# Altium PCB PCB2.PcbDoc
Units mil, origin at the board's own origin, x right, y up, seen from the top; angles counter-clockwise.
Board outline 3950 x 3450 mil, 2 copper layers (Top Layer, Bottom Layer); 74 components, 68 nets, 254 pads, 39 vias.
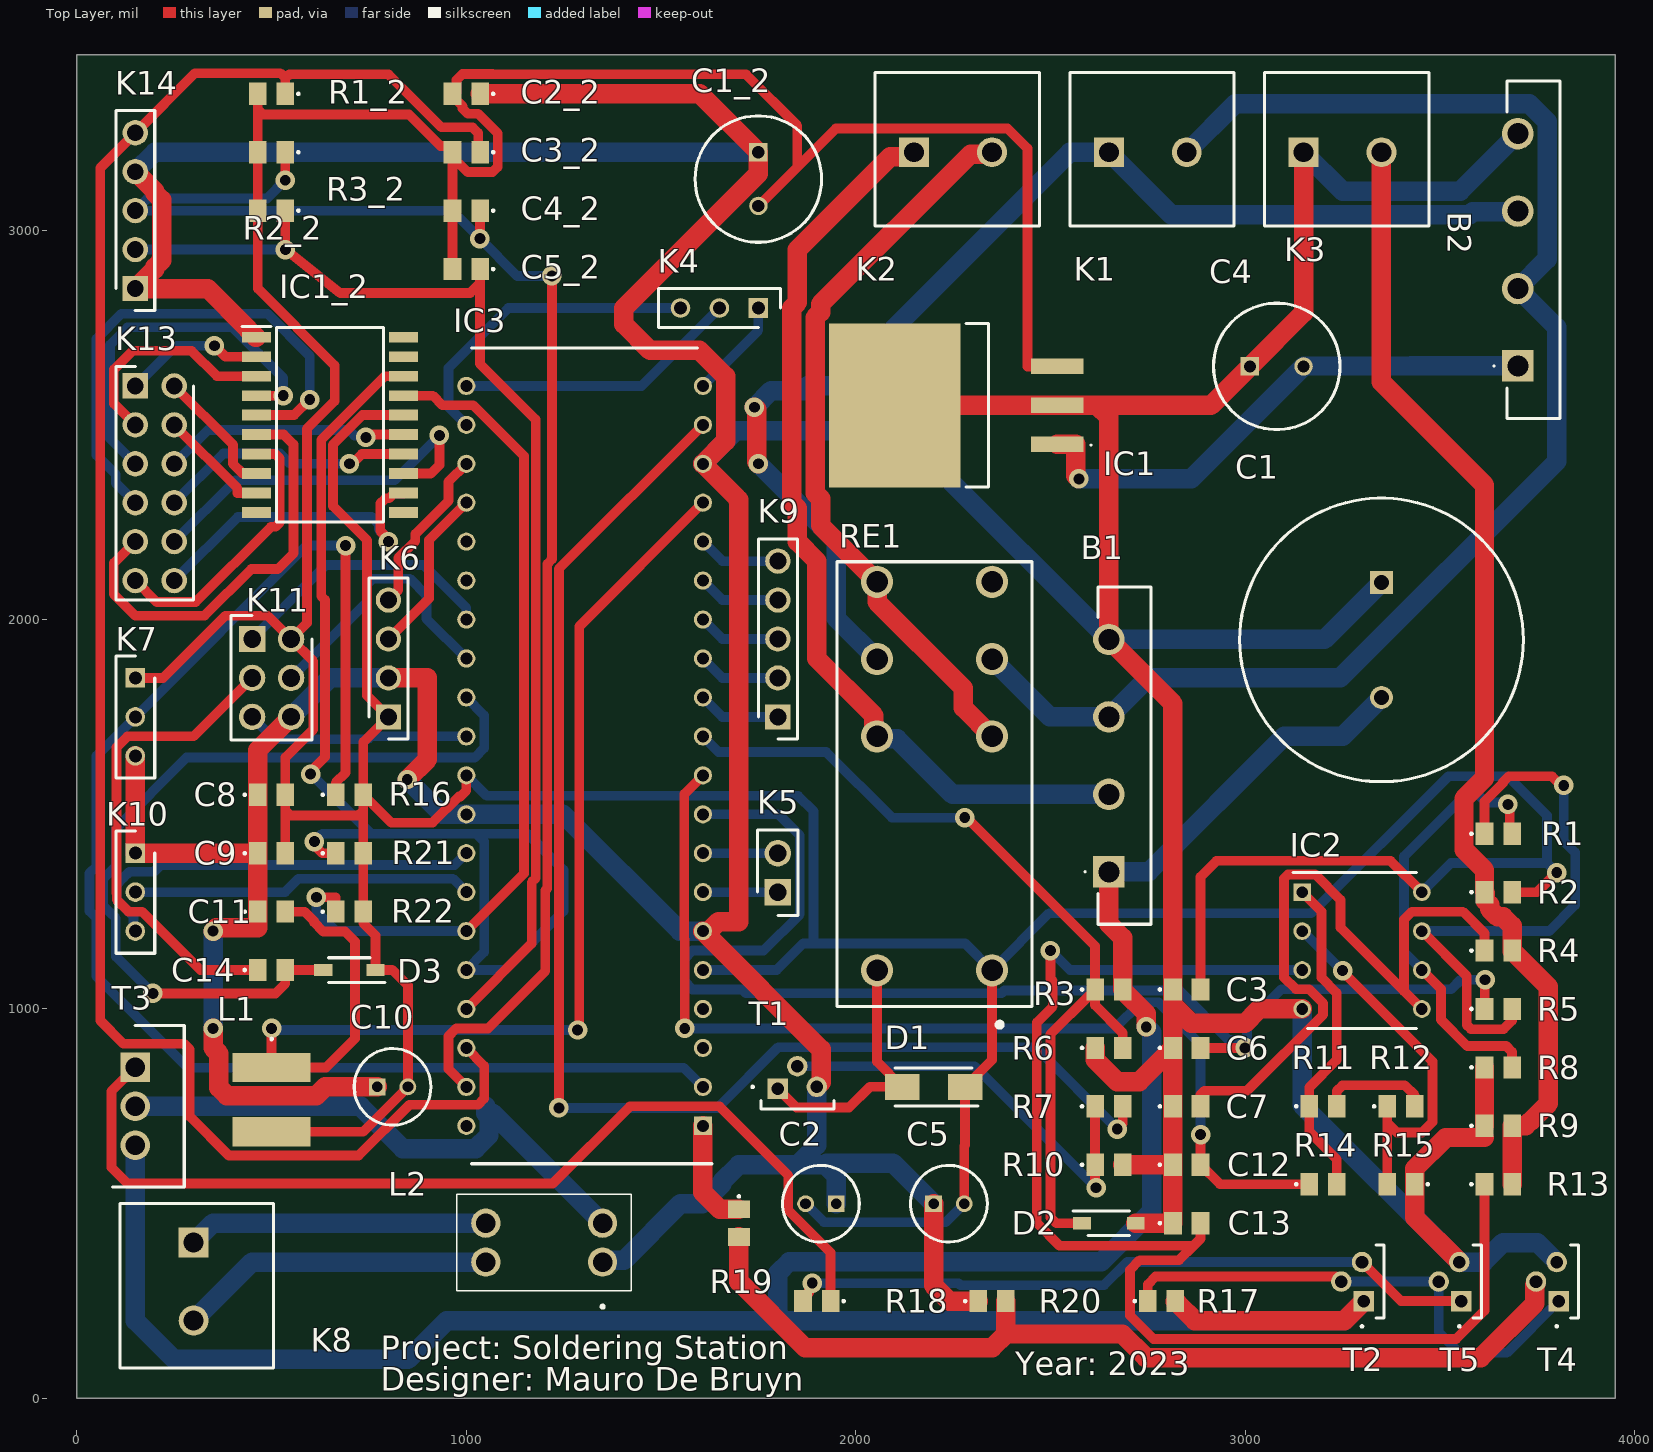
[diagram p0: Top Layer view]
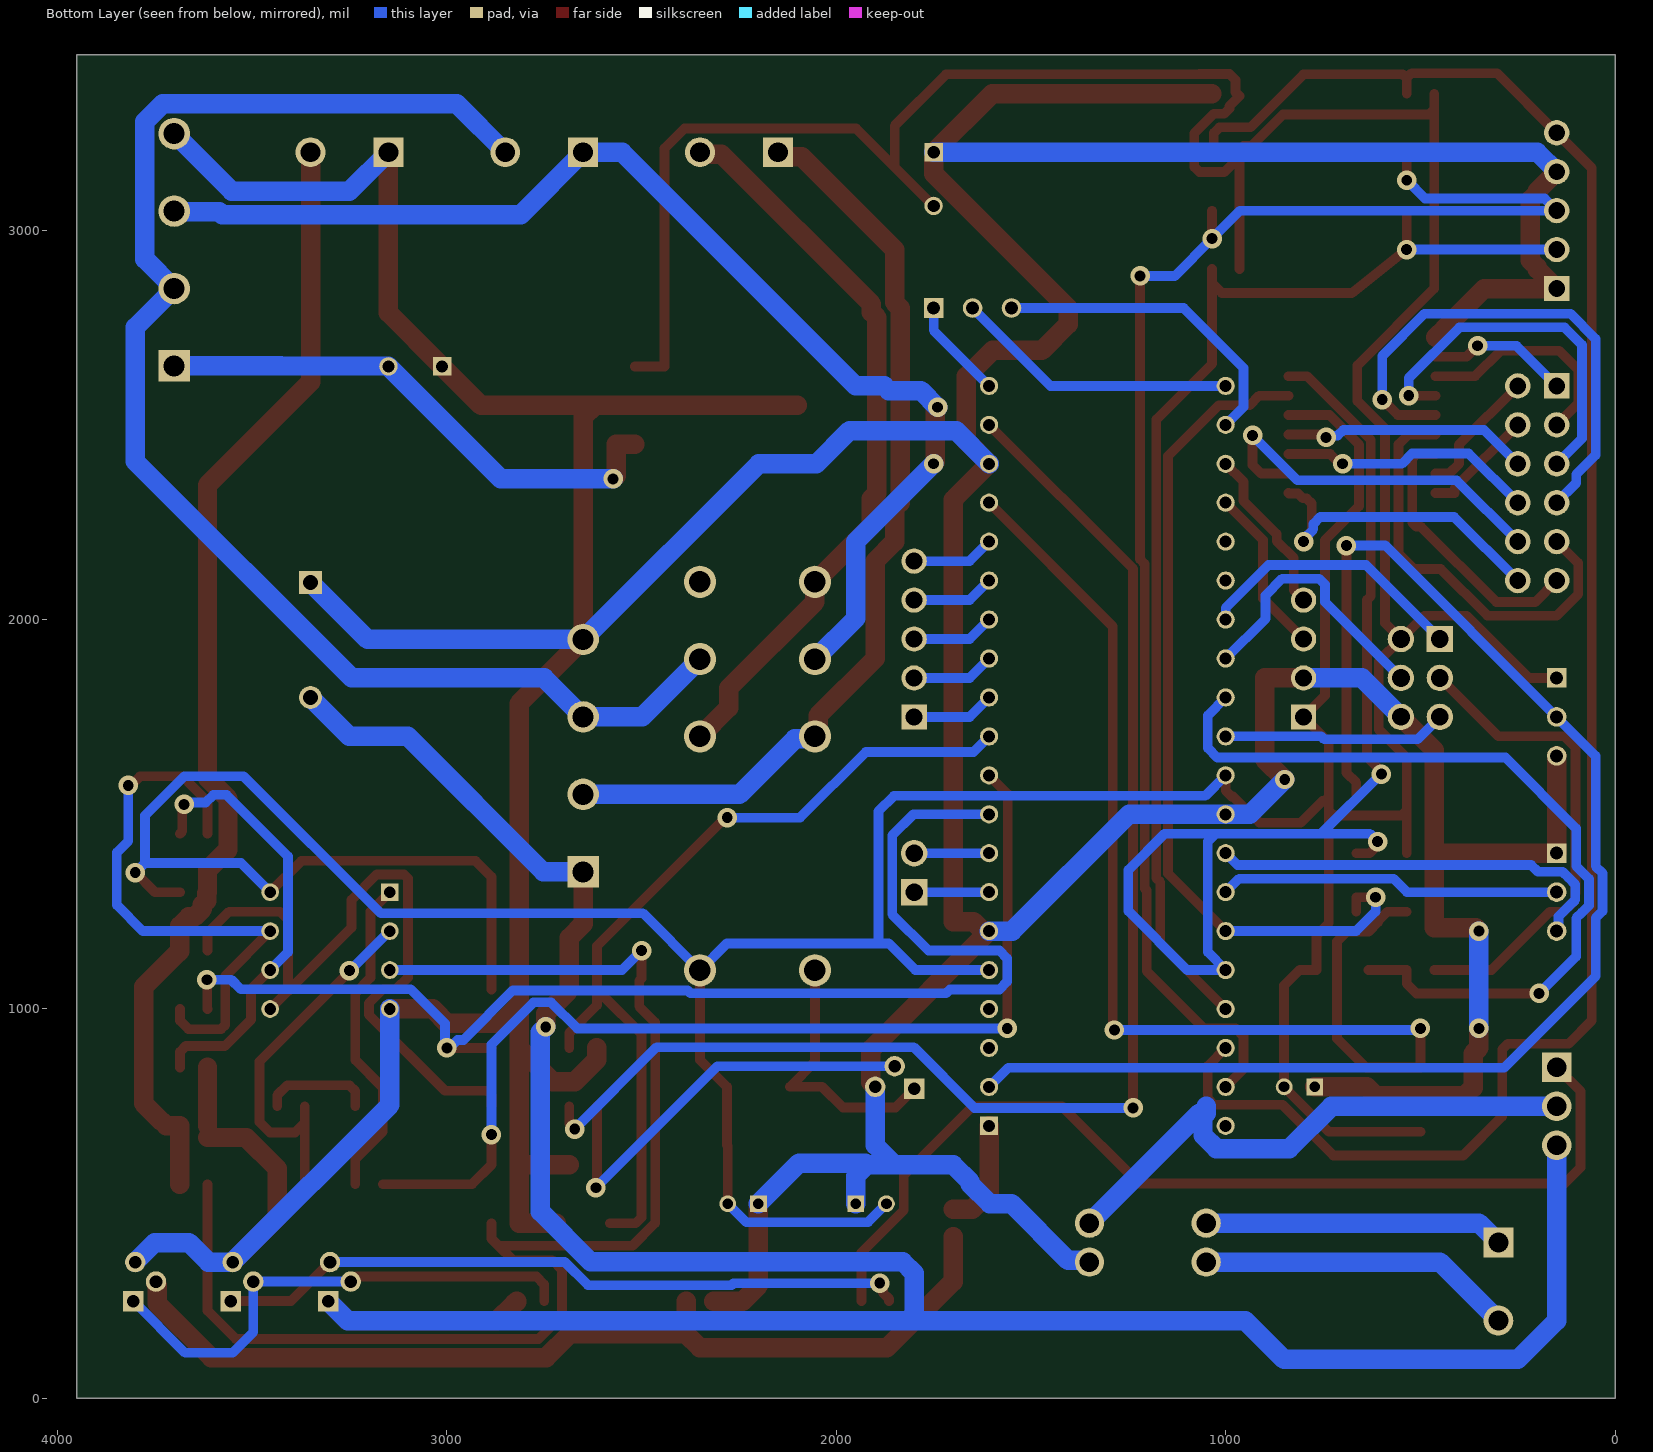
[diagram p1: Bottom Layer view, seen from below]
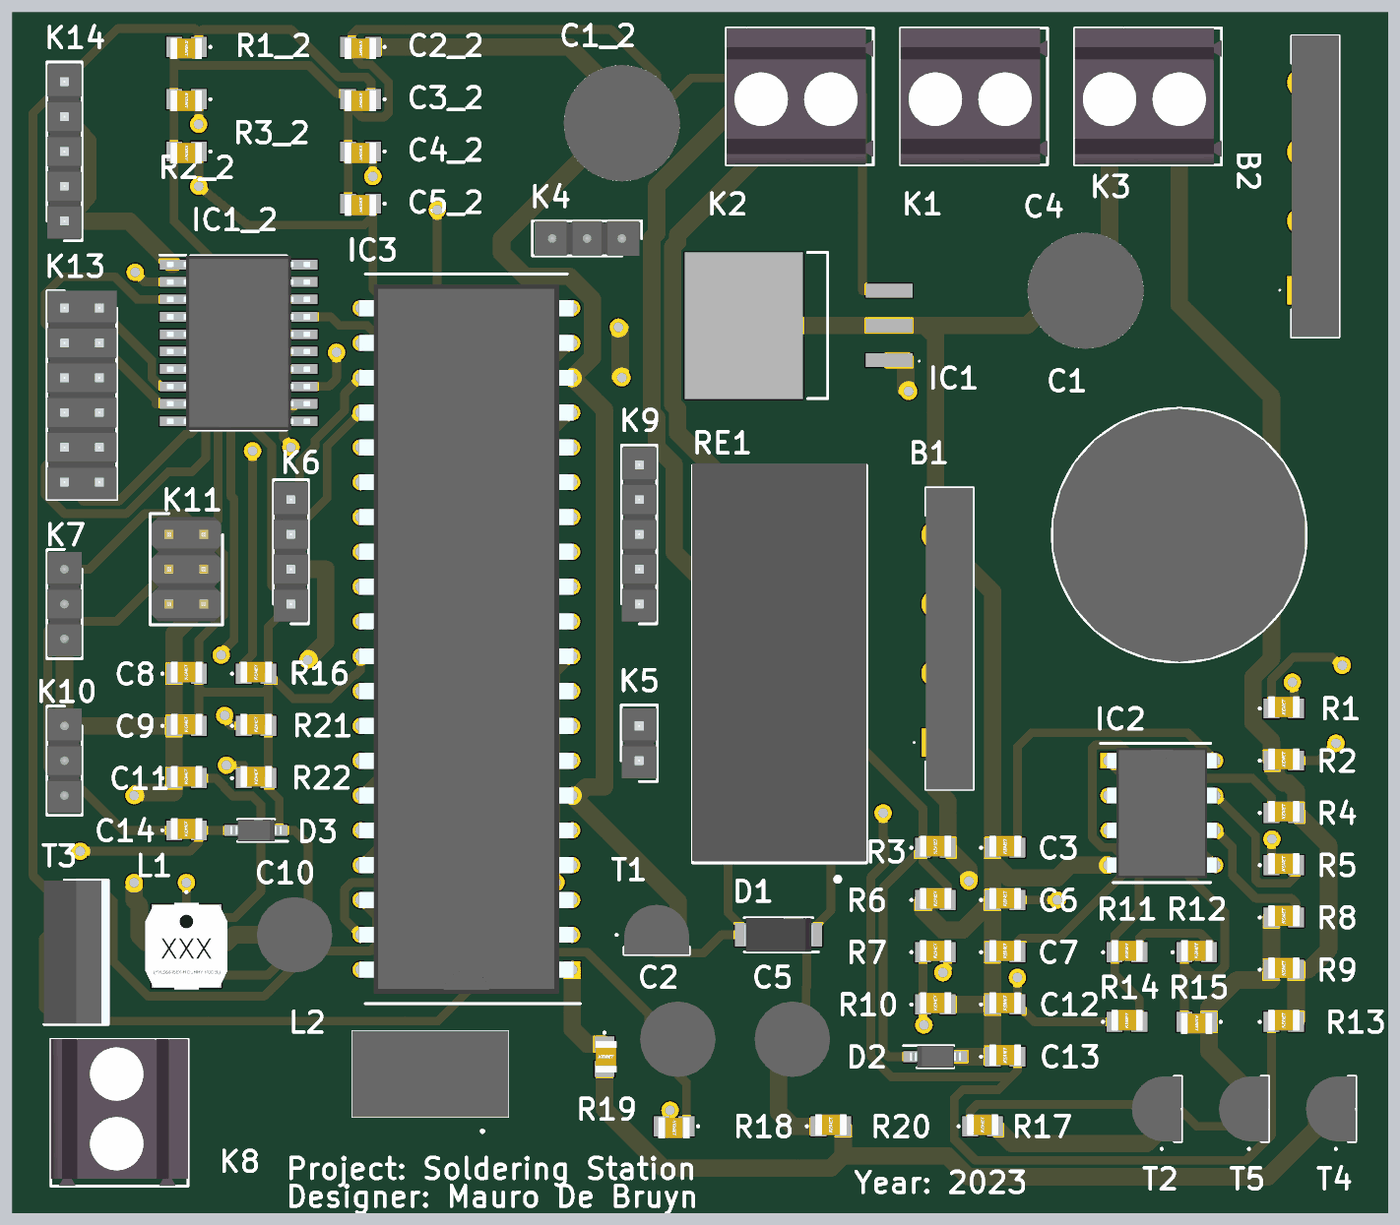
[diagram p2: 3D render of the assembled board from above, using the file's embedded part models]

## Layer stack, top to bottom
Top Solder: solder mask 0.4, Solder Resist, Dk 3.5
Top Layer: signal copper 1.4
Dielectric 1: dielectric 12.6, FR-4, Dk 4.8
Bottom Layer: signal copper 1.4
Bottom Solder: solder mask 0.4, Solder Resist, Dk 3.5

## Board outline
0,0 3950,0 3950,3450 0,3450

## Design rules (kind name [scope] priority, off if disabled: settings)
Clearance [All] p1: gap=5 ignorepadtopadclearanceinfootprint=FALSE
PolygonConnect [All] p1: connectstyle=Relief reliefconductorwidth=10 reliefentries=4 polygonreliefangle="90 Angle" airgapwidth=10
RoutingVias [All] p1: holewidth=28 width=50 viastyle="Through Hole" minholewidth=28 minwidth=50 maxholewidth=28 maxwidth=50
SolderMaskExpansion [All] p1: expansion=4 istentingtop=FALSE
Width [All] p1: maxlimit=50 minlimit=10 preferedwidth=25 minimp=50.000000 maximp=50.000000 favimp=50.000000
30 further rules are at their usual default settings.

## Classes and differential pairs
component class Transistor: K8 L2 R17 R18 R19 R20 T2 T3 T4 T5
component class "Soldering Tip (Opam)": C2 C3 C6 C7 C12 C13 IC2 K3 R1 R2 R4 R5 R8 R9 R11 R12 R13 R14 R15
component class "Power (Bridge Rectifier)": B1 B2 C1 C4 C5 D1 D2 IC1 K1 K2 R3 R6 R7 R10 RE1 T1
component class Display: C1_2 C2_2 C3_2 C4_2 C5_2 IC1_2 K13 K14 R1_2 R2_2 R3_2
component class CPU: C8 C9 C10 C11 C14 D3 IC3 K4 K5 K6 K9 K10 K11 L1 R16 R21 R22

## Components (designator, comment, footprint, x,y, rotation, side; value= is the part's Value field where it differs from the comment)
B1 "GBU606-G" GBU606G 2650,1352.36 r270 top
B2 "GBU606-G" GBU606G 3700,2651.18 r270 top
C1 "4700µF" CAPPRD750W80D1850H4150 3350,2095.28 r270 top
C1_2 "100µF" CAPPRD350W60D825H1300 1750,3200 r270 top
C2 "10µF" CAPPRD200W52D500H1250 1950,500 r180 top
C2_2 "100n" 0805 1000,3350 r180 top
C3 "100n" 0805 2850,1050 r0 top
C3_2 "10n" 0805 1000,3200 r180 top
C4 "100µF" CAPPRD350W60D825H1300 3012.2,2650 r0 top
C4_2 "10n" 0805 1000,3050 r180 top
C5 "10µF" CAPPRD200W52D500H1250 2200,500 r0 top
C5_2 "10n" 0805 1000,2900 r180 top
C6 "10n" 0805 2850,900 r0 top
C7 "10n" 0805 2850,750 r0 top
C8 "100n" 0805 500,1550 r0 top
C9 "100n" 0805 500,1400 r0 top
C10 "10µF" CAPPRD200W52D500H1250 771.26,800 r0 top
C11 "100n" 0805 500,1250 r0 top
C12 "10n" 0805 2850,600 r0 top
C13 "10n" 0805 2850,450 r0 top
C14 "100n" 0805 500,1100 r0 top
D1 "FM4007W-W" DIOM5025X231N 2200,800 r180 top
D2 "SZMMSZ5231BT1G" SOD3716X135N 2650,450 r0 top
D3 "MMSD4448" SOD3816X128N 700,1100 r180 top
IC1 "TL780-05CKTTR" TL78005CKTTR 2251.77,2550 r90 top
IC1_2 "TM1637" tm1637 650,2500 r0 top
IC2 "MCP6002-E_P" DIP781W56P254L950H533Q8N 3300,1150 r0 top
IC3 "ATMEGA4809-PF" DIP1543W58P254L5175H635Q40N 1303.74,1650 r180 top
K1 "2 Pin Connector 1716020000" 1716020000 2650,3200 r0 top
K2 "2 Pin Connector 1716020000" 1716020000 2150,3200 r0 top
K3 "2 Pin Connector 1716020000" 1716020000 3150,3200 r0 top
K4 "M20-9990345" HDRV3W64P0X254_1X3_762X254X864P 1750,2800 r180 top
K5 "M20-9990246" HDRV2W66P0X254_1X2_508X254X874P 1800,1300 r90 top
K6 "UART2" HDRV4W64P0X254_1X4_1016X254X834P 800,1750 r90 top
K7 "M20-9990345" HDRV3W64P0X254_1X3_762X254X864P 150,1850 r270 top
K8 "2 Pin Connector 1716020000" 1716020000 300,400 r270 top
K9 "M20-9990545" HDRV5W64P0X254_1X5_1270X254X864P 1800,1750 r90 top
K10 "UART0" HDRV3W64P0X254_1X3_762X254X864P 150,1400 r270 top
K11 "M20-9760342" HDRV6W66P254_2X3_762X508X830P 450,1950 r270 top
K13 "Display" HDRV12W64P254_2X6_1524X508X909P 150,2600 r270 top
K14 "Encorder" HDRV5W64P0X254_1X5_1270X254X864P 150,2850 r90 top
L1 "10μH" VLS6045 500,767.32 r270 top
L2 "100MH" CM2545X171B10 1350,350 r90 top
R1 "18K" 0805 3650,1450 r0 top
R1_2 "10K" 0805 500,3350 r180 top
R2 "1M" 0805 3650,1300 r0 top
R2_2 "10K" 0805 500,3200 r180 top
R3 "68K" 0805 2650,1050 r0 top
R3_2 "10K" 0805 500,3050 r180 top
R4 "5K6" 0805 3650,1150 r0 top
R5 "5K6" 0805 3650,1000 r0 top
R6 "10K" 0805 2650,900 r0 top
R7 "10K" 0805 2650,750 r0 top
R8 "100E" 0805 3650,850 r0 top
R9 "10M" 0805 3650,700 r0 top
R10 "4K7" 0805 2650,600 r0 top
R11 "18K" 0805 3200,750 r0 top
R12 "18K" 0805 3400,750 r0 top
R13 "5K6" 0805 3650,550 r0 top
R14 "5K6" 0805 3200,550 r0 top
R15 "100E" 0805 3400,550 r180 top
R16 "4K7" 0805 700,1550 r0 top
R17 "4k7" 0805 2785.43,250 r0 top
R18 "100E" 0805 1900,250 r180 top
R19 "10K" 0805 1700,450 r270 top
R20 "4k7" 0805 2350,250 r0 top
R21 "4K7" 0805 700,1400 r0 top
R22 "4K7" 0805 700,1250 r0 top
RE1 "RT424005" RT42 2202.36,1099.21 r90 top
T1 "BC547CBU" BC547CBU 1800,800 r0 top
T2 "BC547CBU" BC547CBU 3300,250 r90 top
T3 "IRF9Z34NPBF" TO254P469X1042X1967-3P 150,850 r270 top
T4 "BC547CBU" BC547CBU 3800,250 r90 top
T5 "BC557" BC547CBU 3550,250 r90 top

## Footprints (in the part's own frame and the unit in brackets; to place one, negate y for a bottom-side part, rotate by r counter-clockwise, add the part's x,y. Pads: shape width x height; smd on the part's side, far side on the other; paste and mask are expansions set on the pad)
0805 [mm]
  rect 1.15x1.45 smd: 1(-0.9,0) 2(0.9,0)
  silkscreen extent -1.8,-0.05 -1.7,0.05, body extent -1.14,-0.66 1.16,0.89, height 0.98
1716020000 [mm]
  rect 1.95x1.95 hole 1.3: 1(0,0)
  round 1.95 hole 1.3: 2(5.08,0)
  silkscreen extent -2.54,-4.8 8.17,5.2, body extent -2.54,-4.8 8.17,5.2, height 13.8
BC547CBU [mm]
  rect 1.333x1.333 hole 0.82: 1(0,-0.127)
  round 1.333 hole 0.82: 2(1.27,1.35) 3(2.54,0)
  silkscreen extent -1.7,-1.43 3.65,0.05, body extent -1.11,-1.43 3.65,2.19, height 5.43
CAPPRD200W52D500H1250 [mm]
  rect 1.1x1.1 hole 0.7: 1(0,0)
  round 1.1 hole 0.7: 2(2,0)
  silkscreen extent -1.5,-2.5 3.5,2.5, body extent -1.75,-2.75 3.75,2.75, height 12.5
CAPPRD350W60D825H1300 [mm]
  rect 1.2x1.2 hole 0.8: 1(0,0)
  round 1.2 hole 0.8: 2(3.5,0)
  silkscreen extent -2.37,-4.13 5.87,4.13, body extent -2.5,-4.25 6,4.25, height 13
CAPPRD750W80D1850H4150 [mm]
  rect 1.5x1.5 hole 1: 1(0,0)
  round 1.5 hole 1: 2(7.5,0)
  silkscreen extent -5.5,-9.25 13,9.25, body extent -5.5,-9.25 13,9.25, height 41.5
CM2545X171B10 [mil]
  round 75 hole 50: 1(0,0) 2(100,0) 3(100,300) 4(0,300)
  silkscreen extent -118,-74 174,374, body extent -74,-74 174,374, height 378
DIOM5025X231N [mm]
  rect 2.25x1.7 smd: 1(-2.05,0) 2(2.05,0)
  silkscreen extent -2.9,-1.24 2.5,1.24, body extent -2.5,-1.24 2.5,1.24, height 2.31
DIP781W56P254L950H533Q8N [mm]
  rect 1.158x1.158 hole 0.758: 1(-3.905,3.81)
  round 1.158 hole 0.758: 2(-3.905,1.27) 3(-3.905,-1.27) 4(-3.905,-3.81) 5(3.905,-3.81) 6(3.905,-1.27) 7(3.905,1.27) 8(3.905,3.81)
  silkscreen extent -4.48,-5.08 3.56,5.08, body extent -4.04,-4.75 4.04,4.75, height 5.33
DIP1543W58P254L5175H635Q40N [mm]
  rect 1.184x1.184 hole 0.784: 1(-7.715,24.13)
  round 1.184 hole 0.784: 2(-7.715,21.59) 3(-7.715,19.05) 4(-7.715,16.51) 5(-7.715,13.97) 6(-7.715,11.43) 7(-7.715,8.89) 8(-7.715,6.35) 9(-7.715,3.81) 10(-7.715,1.27) 11(-7.715,-1.27) 12(-7.715,-3.81) 13(-7.715,-6.35) 14(-7.715,-8.89) 15(-7.715,-11.43) 16(-7.715,-13.97) 17(-7.715,-16.51) 18(-7.715,-19.05) 19(-7.715,-21.59) 20(-7.715,-24.13) 21(7.715,-24.13) 22(7.715,-21.59) 23(7.715,-19.05) 24(7.715,-16.51) 25(7.715,-13.97) 26(7.715,-11.43) 27(7.715,-8.89) 28(7.715,-6.35) 29(7.715,-3.81) 30(7.715,-1.27) 31(7.715,1.27) 32(7.715,3.81) 33(7.715,6.35) 34(7.715,8.89) 35(7.715,11.43) 36(7.715,13.97) 37(7.715,16.51) 38(7.715,19.05) 39(7.715,21.59) 40(7.715,24.13)
  silkscreen extent -8.31,-26.61 7.37,26.61, body extent -7.86,-25.88 7.86,25.88, height 6.35
GBU606G [mm]
  rect 2.055x2.055 hole 1.37: 1(0,0)
  round 2.055 hole 1.37: 2(-5.05,0) 3(-10.1,0) 4(-15.15,0)
  silkscreen extent -18.58,-1.6 3.42,2.75, body extent -18.57,-0.69 3.43,2.76, height 21.05
HDRV2W66P0X254_1X2_508X254X874P [mm]
  rect 1.725x1.725 hole 1.15: 1(0,0)
  round 1.725 hole 1.15: 2(2.54,0)
  silkscreen extent -1.52,-1.32 4.06,1.32, body extent -1.27,-1.27 3.81,1.27, height 8.74
HDRV3W64P0X254_1X3_762X254X864P [mm]
  rect 1.275x1.275 hole 0.85: 1(0,0)
  round 1.275 hole 0.85: 2(2.54,0) 3(5.08,0)
  silkscreen extent -1.45,-1.27 6.53,1.27, body extent -1.27,-1.27 6.35,1.27, height 8.64
HDRV4W64P0X254_1X4_1016X254X834P [mm]
  rect 1.65x1.65 hole 1.1: 1(0,0)
  round 1.65 hole 1.1: 2(2.54,0) 3(5.08,0) 4(7.62,0)
  silkscreen extent -1.45,-1.27 9.07,1.27, body extent -1.27,-1.27 8.89,1.27, height 8.34
HDRV5W64P0X254_1X5_1270X254X864P [mm]
  rect 1.65x1.65 hole 1.1: 1(0,0)
  round 1.65 hole 1.1: 2(2.54,0) 3(5.08,0) 4(7.62,0) 5(10.16,0)
  silkscreen extent -1.45,-1.27 11.61,1.27, body extent -1.27,-1.27 11.43,1.27, height 8.64
HDRV6W66P254_2X3_762X508X830P [mm]
  rect 1.725x1.725 hole 1.15: 1(0,0)
  round 1.725 hole 1.15: 2(0,2.54) 3(2.54,0) 4(2.54,2.54) 5(5.08,0) 6(5.08,2.54)
  silkscreen extent -1.52,-1.37 6.6,3.91, body extent -1.27,-1.27 6.35,3.81, height 8.38
HDRV12W64P254_2X6_1524X508X909P [mm]
  rect 1.65x1.65 hole 1.1: 1(0,0)
  round 1.65 hole 1.1: 2(0,2.54) 3(2.54,0) 4(2.54,2.54) 5(5.08,0) 6(5.08,2.54) 7(7.62,0) 8(7.62,2.54) 9(10.16,0) 10(10.16,2.54) 11(12.7,0) 12(12.7,2.54)
  silkscreen extent -1.27,-1.27 13.97,3.81, body extent -1.27,-1.27 13.97,3.81, height 9.09
RT42 [mm]
  round 2.1 hole 1.4: 1(0,-3.75) 2(15.26,-3.75) 3(20.3,-3.75) 4(25.34,-3.75) 5(25.34,3.75) 6(20.3,3.75) 7(15.26,3.75) 8(0,3.75)
  silkscreen extent -3.67,-6.35 26.65,6.35, body extent -2.21,-6.35 26.79,6.35, height 15.86
SOD3716X135N [mm]
  rect 1.15x0.8 smd: 1(-1.75,0) 2(1.75,0)
  silkscreen extent -2.33,-0.8 1.34,0.8, body extent -1.86,-0.8 1.86,0.8, height 1.35
SOD3816X128N [mm]
  rect 1.2x0.8 smd: 1(-1.7,0) 2(1.7,0)
  silkscreen extent -2.3,-0.8 1.35,0.8, body extent -1.88,-0.8 1.88,0.8, height 1.28
TL78005CKTTR [mm]
  rect 1x3.4 smd: 1(-2.54,-6.745) 2(0,-6.745) 3(2.54,-6.745)
  rect 10.7x8.6 smd: 4(0,3.855)
  silkscreen extent -5.33,-9 5.33,-0.8
tm1637 [mm]
  rect 1.9x0.7 smd: 1(-4.8,5.715) 2(-4.8,4.445) 3(-4.8,3.175) 4(-4.8,1.905) 5(-4.8,0.635) 6(-4.8,-0.635) 7(-4.8,-1.905) 8(-4.8,-3.175) 9(-4.8,-4.445) 10(-4.8,-5.715) 11(4.8,-5.715) 12(4.8,-4.445) 13(4.8,-3.175) 14(4.8,-1.905) 15(4.8,-0.635) 16(4.8,0.635) 17(4.8,1.905) 18(4.8,3.175) 19(4.8,4.445) 20(4.8,5.715)
  silkscreen extent -5.75,-6.35 3.5,6.42, body extent -5.23,-6.35 5.23,6.35, height 2.8
TO254P469X1042X1967-3P [mm]
  rect 1.92x1.92 hole 1.28: 1(0,0)
  round 1.92 hole 1.28: 2(2.54,0) 3(5.08,0)
  silkscreen extent -2.73,-1.49 7.81,3.2, body extent -2.67,-1.5 7.75,3.19, height 18.84
VLS6045 [mm]
  rect 1.9x5.1 smd: 1(-2.1,0) 2(2.1,0)
  silkscreen extent -4,-0.05 -3.9,0.05, body extent -3.15,-3 3.15,3, height 4.5

## Part data
B1 B2: "Bridge Rectifier", Manufacturer_Name="Comchip Technology", Datasheet Link=https://www.comchiptech.com/product.php?id=2217, Height=20.95mm, Manufacturer_Part_Number=GBU606-G
C1: library part 50PK4700MEFC18X40, "Capacitor Polarised", Manufacturer_Name=Rubycon, Mouser2 Part Number=232-50PK4700MEFC18X4, Datasheet Link=https://componentsearchengine.com//50PK4700MEFC18X40.pdf, Height=41.5mm, Manufacturer_Part_Number=50PK4700MEFC18X40, Mouser2 Price/Stock=https://www.mouser.com/Search/Refine.aspx?Keyword=232-50PK4700MEFC18X4
C1_2 C4: library part RGA101M1HBK-0811G, "Capacitor Polarised", Manufacturer_Name=Lelon, Datasheet Link=https://www.arrow.com/en/products/rga101m1hbk-0811g/lelon-electronics, Height=13mm, Manufacturer_Part_Number=RGA101M1HBK-0811G
C2 C5 C10: library part 860020672010, "Capacitor Polarised", Manufacturer_Name="Wurth Elektronik", Mouser2 Part Number=710-860020672010, Datasheet Link=https://componentsearchengine.com//860020672010.pdf, Height=12.5mm, Manufacturer_Part_Number=860020672010, Mouser2 Price/Stock=https://www.mouser.com/Search/Refine.aspx?Keyword=710-860020672010
C2_2 C3 C3_2 C4_2 C5_2 C6 C7 C8 C9 C11 C12 C13 C14: library part "0805 (Capacitor)", "Capacitor", Manufacturer_Name=Kemet, Manufacturer_Part_Number=C0805C391G3GACTU, Datasheet Link=https://content.kemet.com/datasheets/KEM_C1003_C0G_SMD.pdf, Height=1.1mm
D1: "Bridge Rectifier", Manufacturer_Name=Rectron, Mouser2 Part Number=583-FM4007W-W, Datasheet Link=https://componentsearchengine.com//FM4007W-W.pdf, Height=2.31mm, Manufacturer_Part_Number=FM4007W-W, Mouser2 Price/Stock=https://www.mouser.com/Search/Refine.aspx?Keyword=583-FM4007W-W
D2: "Zener Diode", Manufacturer_Name=onsemi, Mouser Part Number=863-SZMMSZ5231BT1G, Arrow Part Number=SZMMSZ5231BT1G, Arrow Price/Stock=https://www.arrow.com/en/products/szmmsz5231bt1g/on-semiconductor?region=nac, Datasheet Link=https://www.onsemi.com/pdf/datasheet/mmsz5221bt1-d.pdf, Height=1.35mm, Manufacturer_Part_Number=SZMMSZ5231BT1G, Mouser Price/Stock=https://www.mouser.co.uk/ProductDetail/onsemi/SZMMSZ5231BT1G?qs=tYFd4l%252BlHeQgPMc6zsX19w%3D%3D
D3: "Diode", Manufacturer_Name=onsemi, Mouser Part Number=512-MMSD4448, Arrow Part Number=MMSD4448, Arrow Price/Stock=https://www.arrow.com/en/products/mmsd4448/on-semiconductor?region=nac, Datasheet Link=https://datasheet.datasheetarchive.com/originals/distributors/Datasheets_SAMA/ce1b7d7eb81c2fed950cf88eaf7986e9.pdf, Height=1.28mm, Manufacturer_Part_Number=MMSD4448, Mouser Price/Stock=https://www.mouser.co.uk/ProductDetail/onsemi-Fairchild/MMSD4448?qs=HxNY1oXTrTS1XYzDYVbdxA%3D%3D
IC1: "Integrated Circuit", Manufacturer_Name="Texas Instruments", Datasheet Link=http://www.ti.com/general/docs/suppproductinfo.tsp?distId=26&gotoUrl=http%3A%2F%2Fwww.ti.com%2Flit%2Fgpn%2Ftl780, Height=5.08mm, Manufacturer_Part_Number=TL780-05CKTTR
IC1_2: library part TM1637__SOP_, "Integrated Circuit", Manufacturer_Name="TITAN MICRO ELECTRONICS", Manufacturer_Part_Number="TM1637 (SOP)", Datasheet Link=https://www.mcielectronics.cl/website_MCI/static/documents/Datasheet_TM1637.pdf, Height=2.8mm
IC2: "Integrated Circuit", Manufacturer_Name=Microchip, Manufacturer_Part_Number=MCP6002-E/P, Mouser2 Part Number=579-MCP6002-E/P, Datasheet Link=https://componentsearchengine.com//MCP6002-E_P.pdf, Height=5.334mm, Mouser2 Price/Stock=https://www.mouser.com/Search/Refine.aspx?Keyword=579-MCP6002-E%2FP
IC3: "Integrated Circuit", Manufacturer_Name=Microchip, Mouser2 Part Number=556-ATMEGA4809-PF, Datasheet Link=https://componentsearchengine.com//ATMEGA4809-PF.pdf, Height=6.35mm, Manufacturer_Part_Number=ATMEGA4809-PF, Mouser2 Price/Stock=https://www.mouser.com/Search/Refine.aspx?Keyword=556-ATMEGA4809-PF
K1 K2 K3 K8: "Connector", Manufacturer_Name=Weidmuller, Manufacturer_Part_Number=1716020000, Datasheet Link=https://catalog.weidmueller.com/catalog/Start.do?ObjectID=1716020000&_ga=2.21797499.1716783809.1613378202-511725545.1613378202
K4 K7: "Connector 3-PIN", Manufacturer_Name=Harwin, Mouser2 Part Number=855-M20-9990345, Datasheet Link=https://componentsearchengine.com//M20-9990345.pdf, Height=8.64mm, Manufacturer_Part_Number=M20-9990345, Mouser2 Price/Stock=https://www.mouser.com/Search/Refine.aspx?Keyword=855-M20-9990345
K5: "Connector 2-PIN", Manufacturer_Name=Harwin, Mouser2 Part Number=855-M20-9990246, Datasheet Link=https://componentsearchengine.com//M20-9990246.pdf, Height=8.74mm, Manufacturer_Part_Number=M20-9990246, Mouser2 Price/Stock=https://www.mouser.com/Search/Refine.aspx?Keyword=855-M20-9990246
K6: library part M20-9770446, "Connector 4-PIN", Manufacturer_Name=Harwin, Mouser2 Part Number=855-M20-9770446, Datasheet Link=https://componentsearchengine.com//M20-9770446.pdf, Height=8.34mm, Manufacturer_Part_Number=M20-9770446, Mouser2 Price/Stock=https://www.mouser.com/Search/Refine.aspx?Keyword=855-M20-9770446
K9: "Connector 5-PIN", Manufacturer_Name=Harwin, Mouser2 Part Number=855-M20-9990545, Datasheet Link=https://componentsearchengine.com//M20-9990545.pdf, Height=8.64mm, Manufacturer_Part_Number=M20-9990545, Mouser2 Price/Stock=https://www.mouser.com/Search/Refine.aspx?Keyword=855-M20-9990545
K10: library part M20-9990345, "Connector 3-PIN", Manufacturer_Name=Harwin, Mouser2 Part Number=855-M20-9990345, Datasheet Link=https://componentsearchengine.com//M20-9990345.pdf, Height=8.64mm, Manufacturer_Part_Number=M20-9990345, Mouser2 Price/Stock=https://www.mouser.com/Search/Refine.aspx?Keyword=855-M20-9990345
K11: "Connector 6-PIN", Manufacturer_Name=Harwin, Datasheet Link=https://cdn.harwin.com/pdfs/M20-976.pdf, Height=8.3mm, Manufacturer_Part_Number=M20-9760342
K13: library part 240-062, "Connector 12-PIN", Manufacturer_Name=Digilent, Datasheet Link=https://digilent.com/shop/2x6-pin-header-5-pack/, Height=9.09mm, Manufacturer_Part_Number=240-062
K14: library part M20-9990545, "Connector 5-PIN", Manufacturer_Name=Harwin, Mouser2 Part Number=855-M20-9990545, Datasheet Link=https://componentsearchengine.com//M20-9990545.pdf, Height=8.64mm, Manufacturer_Part_Number=M20-9990545, Mouser2 Price/Stock=https://www.mouser.com/Search/Refine.aspx?Keyword=855-M20-9990545
L1: library part VLS6045EX-100M-H, "Inductor", Manufacturer_Name=TDK, Mouser2 Part Number=810-VLS6045EX-100M-H, Datasheet Link=https://componentsearchengine.com//VLS6045EX-100M-H.pdf, Manufacturer_Part_Number=VLS6045EX-100M-H, Mouser2 Price/Stock=https://www.mouser.com/Search/Refine.aspx?Keyword=810-VLS6045EX-100M-H
L2: library part CM2545X171B-10, "Transformer", Manufacturer_Name="Laird Technologies", Datasheet Link=https://datasheet.datasheetarchive.com/originals/dk/DKDS-7/122753.pdf, Height=9.5mm, Manufacturer_Part_Number=CM2545X171B-10
R1 R1_2 R2 R2_2 R3 R3_2 R4 R5 R6 R7 R8 R9 R10 R11 R12 R13 R14 R15 R16 R17 R18 R19 R20 R21 R22: library part "0805 (Resistor)", "Resistor", Manufacturer_Name=Kemet, Manufacturer_Part_Number=C0805C391G3GACTU, Datasheet Link=https://content.kemet.com/datasheets/KEM_C1003_C0G_SMD.pdf, Height=1.1mm
RE1: "Relay or Contactor", Manufacturer_Name="TE Connectivity", Mouser2 Part Number=655-RT424005, Datasheet Link=https://componentsearchengine.com//RT424005.pdf, Manufacturer_Part_Number=RT424005, Mouser2 Price/Stock=https://www.mouser.com/Search/Refine.aspx?Keyword=655-RT424005
T1 T2 T4: "Transistor BJT NPN", Manufacturer_Name="ON Semiconductor", Datasheet Link=https://www.onsemi.com/pdf/datasheet/bc550-d.pdf, Height=5.33mm, Manufacturer_Part_Number=BC547CBU
T3: "MOSFET (P-Channel)", Manufacturer_Name=Infineon, Mouser2 Part Number=942-IRF9Z34NPBF, Datasheet Link=https://componentsearchengine.com//IRF9Z34NPBF.pdf, Height=4.69mm, Manufacturer_Part_Number=IRF9Z34NPBF, Mouser2 Price/Stock=https://www.mouser.com/Search/Refine.aspx?Keyword=942-IRF9Z34NPBF
T5: "Transistor BJT NPN", Manufacturer_Name="ON Semiconductor", Manufacturer_Part_Number=BC547CBU, Datasheet Link=https://www.onsemi.com/pdf/datasheet/bc550-d.pdf, Height=5.33mm

## Via types
v1: diameter 50, hole 28, Top Layer to Bottom Layer, 39 vias

## Nets (pads, with @x,y where several pads share a name; then routed paths per layer and width w, separated by ;. In a path a pad name is that pad's centre, name@x,y a point inside that pad or via, vN(x,y) a via of type N, cw(c..) or ccw(c..) an arc to the next point about the centre after c; other vN are vias at no path point)
+5: C1_2.2 C2.2 C2_2.2 C3.2 C3_2.2 C4_2.2 C5.2 C5_2.2 C8.2 C9.2 C10.2 D1.1 D3.1 IC1.3 IC1_2.16 IC2.8 IC3.5 IC3.31 K6.1 K7.1 K11.2 L1.2 R1_2.2 R2.2 R2_2.2 R3_2.2 R16.2 R21.2 R22.2 RE1.1 | length 15738.4
  Top Layer w25: K7.1 221.29,1850 381.29,2010 490,2010 K11.2 ; R1_2.2 464.57,3310 ; L1.2 734.65,684.65 C10.2 850,1060 810,1100 D3.1 766.93,1188.5 735.43,1220 R22.2 R21.2 735.43,1510 ; C9.2 535.43,1510 ; R16.2@735.43,1544.09 745.57,1533.96 751.48,1533.96 807.02,1478.41 913.63,1478.41 981.03,1545.81 985.36,1545.81 1000,1560.45 IC3.31 ; IC1_2.16 733.43,2525 657.5,2449.07 657.5,2291.22 745,2203.72 745,1805 K6.1 735.43,1685.43 R16.2 735.43,1510 ; C5_2.2 C4_2.2 C3_2.2@964.57,3187.87 ; C1_2.2 1850,3162.2 ; C5.2 2278.74,649 2280.71,650.97 D1.1 2350,869.29 RE1.1 ; IC1.3 2441,2650 2441,3210 2390,3261 1948.8,3261 1850,3162.2 ; C3.2 2885.43,1339.43 2926.3,1380.3 3373.44,1380.3 IC2.8 ; R2.2 3750,1300 v1(3800,1350) ; 464.57,3310 477.57,3297 853,3297 933.96,3216.04 954.43,3216.04 964.57,3205.91 C3_2.2 C3_2.2@964.57,3187.87 ; 464.57,3310 R2_2.2 R3_2.2 464.57,2850 662,2652.57 662,2561 591,2490 591,1991 K11.2 ; 535.43,1510 C8.2 535.43,1645.54 607,1717.1 607,1893 K11.2 ; 535.43,1510 548.43,1497 722.43,1497 735.43,1510 ; C3_2.2@964.57,3187.87 1003.48,3148.96 1067.39,3148.96 1080.57,3162.14 1080.57,3248.77 1030.38,3298.96 1003.48,3298.96 990.3,3312.14 990.3,3318.36 964.57,3344.09 974.7,3354.23 974.7,3385.36 990.39,3401.04 1067.39,3401.04 1068.43,3400 1718,3400 1850,3268 1850,3162.2
  Bottom Layer w25: IC3.31 1052.5,1547.5 1852.01,1547.5 1891.46,1508.05 1891.46,1168 ; IC3.5 1797,1100 1865,1168 1891.46,1168 ; C2.2 1918.76,452.5 2231.24,452.5 C5.2 ; IC2.8 3528.74,1375 3775,1375 ; v1(3800,1350) 3775,1375 ; 1891.46,1168 2281.21,1168 RE1.1 2496.79,1246 3170,1246 3521.5,1597.5 3674.5,1597.5 3775,1497 3775,1375
GND: B1.4 B2.4 C1.1 C1_2.1 C2.1 C2_2.1 C3.1 C4.1 C5.1 C6.1 C7.1 C8.1 C9.1 C10.1 C11.1 C12.1 C13.1 D2.2 IC1.2 IC1.4 IC1_2.1 IC2.4 IC3.6 IC3.18 IC3.32 K3.1 K6.2 K7.3 K10.1 K11.6 K14.1 K14.4 L2.1 R6.1 R8.1 R9.1 R10.2 R15.1 R20.1 T1.3 T4.3 T5.3 | length 20591.9
  Top Layer w25: 1693.07,2314.41 1700,2307.48 ; 1699.1,1224.42 1700,1225.27 ; 3033,997 3036,1000 ; 3614.57,670 R9.1
  Top Layer w50: K7.3 K10.1 C9.1 ; K14.4 200,3100 200,3095.43 217.48,3077.95 217.48,2922.05 200,2904.57 200,2900 K14.1 336.02,2850 437.4,2748.62 437.4,2747.44 459.84,2725 IC1_2.1 ; v1(350,950) 350,900 364.61,885.39 364.61,798.1 385.11,777.6 614.89,777.6 637.29,800 C10.1 ; v1(350,1200) 358.43,1208.43 464.57,1208.43 C11.1 C9.1 ; K11.6 464.57,1664.57 C8.1 C9.1 ; K6.2 900,1850 900,1640.87 v1(848.42,1589.29) ; C2_2.1 1600,3350 C1_2.1 1750,3145.11 1404.68,2799.79 1404.68,2758.37 1471.79,2691.26 1598.68,2691.26 1665.79,2624.15 1665.79,2458.31 IC3.18 1693.07,2314.41 ; 1699.1,1224.42 1647.62,1224.42 1623.21,1200 IC3.6 1911.24,896.24 1911.24,811.91 1900,800.67 T1.3 ; 1700,1225.27 1700,2307.48 ; IC1.4 IC1.2 2620,2550 ; C5.1 2200,290 2240,250 R20.1 ; R6.1 2614.57,870 2671.02,813.54 2728.11,813.54 C6.1 ; R10.2 C12.1 ; D2.2 C13.1 C12.1 ; 3033,997 2999.24,963.24 2957.82,963.24 2957.51,963.54 2861.02,963.54 2814.57,1010 ; 3036,1000 IC2.4 ; K3.1 3150,2787.8 C4.1 2912.2,2550 2620,2550 ; T5.3 3435.43,464.57 R15.1 3435.43,590 3515.43,670 3614.57,670 ; R9.1 R8.1 ; 2620,2550 2650,2520 B1.4 2814.57,1784.25 C3.1 2814.57,1010 ; C12.1 C7.1 C6.1 ; C6.1 2814.57,1010
  Bottom Layer w50: K14.4 200,3200 C1_2.1 ; v1(350,950) v1(350,1200) ; K11.6 650,1850 K6.2 ; v1(848.42,1589.29) 937.71,1500 IC3.32 1248.26,1500 1548.26,1200 IC3.6 ; L2.1 1354.55,354.55 1404.55,354.55 1550,500 1605.85,500 1655.62,549.77 ; IC3.18 1692.5,2485.02 1965.96,2485.02 2050.98,2400 2198.82,2400 B1.4 3203.54,1948.82 C1.1 ; 1655.62,555.62 1700,600 1850,600 ; T1.3 1900,650 1850,600 ; C2.1 1950,570.71 1920.71,600 ; C5.1 2095.71,604.29 1925,604.29 1920.71,600 ; IC2.4 3146.26,753.74 T5.3 3612.5,350 3662.5,400 3750,400 T4.3 ; K3.1 3250,3100 3552.36,3100 B2.4 ; 1850,600 1920.71,600
NetB1_2: B1.2 K2.1 RE1.7 | length 2407.1
  Top Layer w25: 1850,2200 1850,2208.58 ; RE1.7@2046.61,1708.11 RE1.7 ; K2.1@2138.76,3188.76 K2.1
  Top Layer w50: 1850,2200 1900,2150 1900,1900 2046.61,1753.39 RE1.7@2046.61,1708.11 ; 1850,2208.58 1850,2285.73 1835.71,2300.02 1835.71,2799.98 1850,2814.27 1850,2950 2088.76,3188.76 K2.1@2138.76,3188.76
  Bottom Layer w50: RE1.7 2060.98,1693.75 2106.25,1693.75 2248.82,1551.18 B1.2
NetB1_3: B1.3 B2.2 K1.2 RE1.3 | length 3725.1
  Bottom Layer w50: RE1.3 2498.43,1750 B1.3 2750,1850 3244,1850 3800,2406 3800,2750 B2.2 3775.45,2925.45 3775.45,3278.89 3729.34,3325 2975,3325 K1.2
NetB2_1: B2.1 C4.2 IC1.1 | length 1386.7
  Top Layer w25: v1@2565,2369 v1(2573,2361)
  Top Layer w50: IC1.1 2565,2450 v1@2565,2369
  Bottom Layer w50: v1(2573,2361) 2861,2361 C4.2 3426.18,2651.18 B2.1
NetB2_3: B2.3 K1.1 RE1.6 | length 3078.2
  Top Layer w50: v1(1740,2545.02) 1745.26,2539.76 1745.26,2404.74 v1(1750,2400)
  Bottom Layer w50: v1(1740,2545.02) 1782.92,2587.94 1865,2587.94 1877.06,2600 1950,2600 2550,3200 K1.1 2810,3040 3577.21,3040 3584.55,3047.33 3698.51,3047.33 B2.3 ; v1(1750,2400) 1950,2200 1950,2003.15 RE1.6
NetC3_2_1: C3_2.1 IC3.38 K14.5 R1_2.1 | length 4864.3
  Top Layer w25: R1_2.1 535.43,3390 ; IC3.38 1046,854 1046,770 1030,754 853.5,754 723.5,624 390,624 290,724 290,896.36 275.36,911 119,911 60.02,969.98 60.02,3160.02 K14.5 303,3403 522.43,3403 535.43,3390 ; C3_2.1 1030.53,3204.9 1030.53,3249.31 1015.89,3263.96 936.04,3263.96 800,3400 545.43,3400 535.43,3390
NetC4_2_1: C4_2.1 IC3.39 K14.3 R2_2.1 | length 3960.8
  Top Layer w25: v1(535,3128) 535.43,3128.43 R2_2.1 ; IC3.39 954,846 954,930 974,950 1056,950 1203,1097 1203,1304.01 1208,1309.01 1208,2142.95 1220,2154.95 v1(1220,2882.41) ; v1(1035,2978) 1035.43,2978.43 C4_2.1
  Bottom Layer w25: v1(535,3128) 488,3081 181,3081 K14.3 963,3050 v1(1035,2978) 1130.59,2882.41 v1(1220,2882.41)
NetC5_2_1: C5_2.1 IC3.37 K14.2 R3_2.1 | length 3067.6
  Top Layer w25: R3_2.1 v1(535.43,2950) 676,2838.43 1010,2838.43 1035.43,2863.87 ; IC3.37 1168,1168 1168,1325.57 1178,1335.57 1178,2514 1035.43,2656.57 1035.43,2863.87 ; C5_2.1 1035.43,2863.87
  Bottom Layer w25: K14.2 v1(535.43,2950)
NetC6_2: C6.2 IC3.9 R5.1 | length 3304
  Top Layer w25: C6.2 v1(3000,900) ; R5.1 3615.26,1000.69 3615.26,1074.34 v1(3615.95,1075.03)
  Bottom Layer w25: IC3.9 1802,1500 1856.46,1445.54 1856.46,1243 1763.46,1150 1581,1150 1561,1130 1561,1070 1581,1050 1708,1050 1717.63,1040.37 2374.37,1040.37 2381.19,1047.19 2830.81,1047.19 2957.48,920.52 2972.72,920.52 2993.24,900 v1(3000,900) 3004.5,904.5 3004.5,962.5 3093,1051 3529.5,1051 3553.53,1075.03 v1(3615.95,1075.03)
NetC7_2: C7.2 IC2.5 R4.1 | length 1850.5
  Top Layer w25: C7.2 2885.43,780 2895.43,790 3005,790 3200,985 3200,1015 3164,1051 3130,1051 3100,1081 3100,1335.3 3110,1345.3 3180,1345.3 3245,1280.3 3245,1208.74 3408,1045.74 ; IC2.5 3408,1045.74 ; R4.1 3614.57,1194.43 3559,1250 3428,1250 3408,1230 3408,1045.74
NetC11_2: C11.2 IC3.17 L1.1 | length 3081.3
  Top Layer w25: v1(500,950) L1.1 640,850 714.19,924.19 714.19,1173.25 688.48,1198.96 632.61,1198.96 608.72,1222.85 608.72,1226.11 584.82,1250 C11.2 ; v1(1286,946) 1290,950 1290,1982.52 IC3.17
  Bottom Layer w25: v1(500,950) 504,946 v1(1286,946)
NetC12_2: C12.2 IC3.10 R14.1 | length 2676
  Top Layer w25: v1(1561,950) 1561,1179.3 1559.98,1180.32 1559.98,1552.5 IC3.10 ; v1(2885.43,677.57) C12.2 2935.43,550 R14.1
  Bottom Layer w25: v1(1561,950) 2665,950 2732.19,1017.19 2777.17,1017.19 2885.43,908.92 v1(2885.43,677.57)
NetC13_2: C13.2 IC2.3 R13.1 | length 3474.9
  Top Layer w25: v1(2500,1150) 2500,1077.98 2506,1071.98 2506,1006.73 2465,965.73 2465,450.15 2523.15,392 2867.43,392 ; C13.2 2885.43,410 2867.43,392 ; R13.1 3614.57,225.27 3541.8,152.5 2764.5,152.5 2704,213 2704,330 2729,355 2830.43,355 2867.43,392
  Bottom Layer w25: v1(2500,1150) 2550,1100 IC2.3
NetC14_1: C14.1 K11.3 | length 1250.5
  Top Layer w25: K11.3 300,1700 130,1700 102,1672 102,1298 102.4,1297.6 102.4,1280.28 132.69,1250 167.31,1250 317.31,1100 C14.1
NetC14_2: C14.2 D3.2 IC3.29 | length 2153.9
  Top Layer w25: v1(195,1040) 510,1040 535.43,1065.43 C14.2 D3.2
  Bottom Layer w25: v1(195,1040) 100,1135 100,1233.19 85,1248.19 67.4,1265.79 67.4,1334.21 85,1351.81 100,1366.81 100,1464 281.81,1645.81 1021.81,1645.81 1046,1670 1046,1754 IC3.29
NetD1_2: D1.2 RE1.8 T1.1 | length 687.1
  Top Layer w25: T1.1 1848,747 1983,747 2036,800 D1.2 2054.72,864.57 RE1.8
NetD2_1: D2.1 IC3.11 R3.1 R6.2 | length 2244.4
  Top Layer w25: v1(2280,1491.18) 2284.82,1491.18 2614.57,1161.43 R3.1 ; D2.1 2514.64,450 2500,464.64 2500,935.43 2598.52,1033.96 2604.43,1033.96 2614.57,1044.09 R3.1 ; R6.2 2685.43,939 2614.57,1009.87 R3.1
  Bottom Layer w25: IC3.11 1647.48,1660 1924,1660 2092.82,1491.18 v1(2280,1491.18)
NetIC1_2_2: IC1_2.2 K13.1 | length 365.3
  Top Layer w25: v1(353,2703) 381,2675 IC1_2.2
  Bottom Layer w25: K13.1 253,2703 v1(353,2703)
NetIC1_2_3: IC1_2.3 K13.3 | length 577.5
  Top Layer w25: K13.3 95.02,2554.98 95.02,2641.8 143.22,2690 294.5,2690 359.5,2625 IC1_2.3
NetIC1_2_4: IC1_2.4 K13.5 | length 964.4
  Top Layer w25: IC1_2.4 v1(530,2575)
  Bottom Layer w25: K13.5 85,2465 85,2705.5 130,2750.5 400,2750.5 530,2620.5 v1(530,2575)
NetIC1_2_5: IC1_2.5 K13.7 | length 1347.5
  Top Layer w25: IC1_2.5 558,2525 v1(598,2565)
  Bottom Layer w25: K13.7 100,2350 100,2372.25 50,2422.25 50,2720.86 114.64,2785.5 489.5,2785.5 598,2677 v1(598,2565)
NetIC1_2_6: IC1_2.6 K13.9 | length 1093.4
  Top Layer w25: K13.9 95.02,2145.02 95.02,2064.62 149.64,2010 328,2010 448,2130 516,2130 556,2170 556,2450 531,2475 IC1_2.6
NetIC1_2_7: IC1_2.7 K13.11 | length 707.8
  Top Layer w25: K13.11 205,2045 305,2045 498,2238 510,2238 521,2249 521,2414 510,2425 IC1_2.7
NetIC1_2_8: IC1_2.8 K13.2 | length 332.9
  Top Layer w25: K13.2 401,2449 401,2400 426,2375 IC1_2.8
NetIC1_2_9: IC1_2.9 K13.4 | length 291.1
  Top Layer w25: K13.4 412,2338 412,2325 IC1_2.9
NetIC1_2_12: IC1_2.12 K13.12 | length 833.9
  Top Layer w25: v1(800,2200) 800,2206.76 779.07,2227.69 779.07,2298.1 792.25,2311.28 801.63,2311.28 814.07,2323.72 837.7,2323.72 IC1_2.12
  Bottom Layer w25: K13.12 413.38,2263.38 757.32,2263.38 775,2245.71 775,2231.77 800,2206.76 v1(800,2200)
NetIC1_2_13: IC1_2.13 K13.10 | length 971.2
  Top Layer w25: IC1_2.13 909,2375 931,2397 v1(931,2473)
  Bottom Layer w25: K13.10 407.5,2357.5 815.5,2357.5 v1(931,2473)
NetIC1_2_14: IC1_2.14 K13.8 | length 662.5
  Top Layer w25: v1(700,2400) 706.76,2400 731.76,2425 IC1_2.14
  Bottom Layer w25: K13.8 376.22,2426.22 521.62,2426.22 547.84,2400 v1(700,2400)
NetIC1_2_15: IC1_2.15 K13.6 | length 636.2
  Top Layer w25: v1(742.13,2467.5) 748.89,2467.5 756.39,2475 IC1_2.15
  Bottom Layer w25: K13.6 337,2487 698,2487 712.72,2472.28 737.34,2472.28 v1(742.13,2467.5)
NetIC1_2_17: IC1_2.17 IC3.35 R22.1 | length 2183.8
  Top Layer w25: v1(615,1287) 664.57,1287 R22.1 ; IC1_2.17 914,2575 939,2550 1018,2550 1148,2420 1148,1348 IC3.35
  Bottom Layer w25: v1(615,1287) 615,1250 665,1200 IC3.35
NetIC1_2_18: IC1_2.18 IC3.36 R21.1 | length 2930.7
  Top Layer w25: v1(600,1603.31) 600,1610.07 637,1647.07 637,2050.74 627.5,2060.24 627.5,2461.5 791,2625 IC1_2.18 ; v1(610,1430) 610,1420 630,1400 R21.1
  Bottom Layer w25: v1(600,1603.31) 601.69,1603.31 755,1450 ; v1(610,1430) 630,1450 755,1450 ; 755,1450 1026,1450 ; 1026,1450 1157,1450 1250,1357 1250,1251 1099,1100 IC3.36 1046,1146 1046,1430 1026,1450
NetIC2_1: IC2.1 R11.1 R14.2 | length 845.3
  Top Layer w25: IC2.1 3195.72,1250.54 3195.72,1080.3 3235,1041.02 3235,869.01 3164.57,798.58 R11.1 3164.57,684.87 3235.43,614 R14.2
NetIC2_2: IC2.2 R12.1 R15.2 | length 968.3
  Top Layer w25: v1(3250.26,1098.5) 3250.26,1096 3481,865.26 3481,710 3454,683 3390,683 3364.57,708.43 ; R15.2 3364.57,708.43 ; R12.1 3364.57,708.43
  Bottom Layer w25: IC2.2 3147.51,1200 3249.01,1098.5 v1(3250.26,1098.5)
NetIC2_6: IC2.6 R1.2 R8.2 | length 1137.9
  Top Layer w25: IC2.6 3502.65,1051.09 3502.65,972.35 3570,905 3670.43,905 3685.43,890 R8.2 ; v1(3674.57,1525.43) 3679.35,1520.65 3679.35,1456.08 R1.2
  Bottom Layer w25: IC2.6 3408,1145.74 3408,1392 3566,1550 3599.57,1550 3619.35,1530.22 3669.78,1530.22 v1(3674.57,1525.43)
NetIC2_7: IC2.7 R1.1 R5.2 | length 1514.1
  Top Layer w25: IC2.7 3569,1084.74 3569,959 3580,948 3663.43,948 3685.43,970 R5.2 ; R1.1 3614.57,1532.61 3662.07,1580.11 3662.07,1582.86 3676.71,1597.5 3787.74,1597.5 3811.24,1574 v1(3818,1574)
  Bottom Layer w25: IC2.7 3781,1200 3847.5,1266.5 3847.5,1402.12 3818,1431.62 v1(3818,1574)
NetIC3_1: IC3.1 R19.1 | length 281.6
  Top Layer w50: IC3.1 1607.48,528.95 1651,485.43 R19.1
NetIC3_2: IC3.2 K7.2 R16.1 | length 3769.9
  Top Layer w25: R16.1 664.57,1581 690,1606.43 v1(690,2190)
  Bottom Layer w25: v1(690,2190) 590,2190 K7.2 50,1650 50,1366.31 32.4,1348.71 32.4,1251.29 50,1233.69 50,1084 285,849 1558.48,849 IC3.2
NetIC3_7: IC3.7 K5.1 | length 192.5
  Bottom Layer w25: IC3.7 K5.1
NetIC3_8: IC3.8 K5.2 | length 192.5
  Bottom Layer w25: IC3.8 K5.2
NetIC3_12: IC3.12 K9.1 | length 213.2
  Bottom Layer w25: IC3.12 1657.48,1750 K9.1
NetIC3_13: IC3.13 K9.2 | length 213.2
  Bottom Layer w25: IC3.13 1657.48,1850 K9.2
NetIC3_14: IC3.14 K9.3 | length 213.2
  Bottom Layer w25: IC3.14 1657.48,1950 K9.3
NetIC3_15: IC3.15 K9.4 | length 213.2
  Bottom Layer w25: IC3.15 1657.48,2050 K9.4
NetIC3_16: IC3.16 K9.5 | length 213.2
  Bottom Layer w25: IC3.16 1657.48,2150 K9.5
NetIC3_19: IC3.19 R7.2 | length 3556.7
  Top Layer w25: v1(1238,746) 1238,2130.52 IC3.19 ; v1(2671.55,691.45) 2685.43,705.34 R7.2
  Bottom Layer w25: v1(1238,746) 1645,746 1801,902 2461,902 v1(2671.55,691.45)
NetIC3_20: IC3.20 K4.1 | length 259
  Bottom Layer w25: IC3.20 1750,2742.52 K4.1
NetIC3_21: IC3.21 K4.2 | length 732.8
  Bottom Layer w25: IC3.21 1450,2600 K4.2
NetIC3_22: IC3.22 K4.3 | length 824.8
  Bottom Layer w25: IC3.22 954,2546 954,2646 1108,2800 K4.3
NetIC3_23: IC3.23 K6.4 | length 432.8
  Top Layer w25: K6.4 825,2075 825,2157.82 869,2201.82 869,2220 954,2305 954,2354 IC3.23
NetIC3_24: IC3.24 K6.3 | length 432.8
  Top Layer w25: K6.3 904,2054 904,2204 IC3.24
NetIC3_27: IC3.27 K11.1 | length 704.2
  Bottom Layer w25: K11.1 639.98,2139.98 890,2139.98 1000,2029.98 IC3.27
NetIC3_28: IC3.28 K11.4 | length 702
  Bottom Layer w25: K11.4 745,2045 745,2090 759.98,2104.98 855,2104.98 898,2061.98 898,2002 IC3.28
NetIC3_30: IC3.30 K11.5 | length 576.9
  Bottom Layer w25: K11.5 507.5,1692.5 747.08,1692.5 754.58,1700 IC3.30
NetIC3_33: IC3.33 K10.3 | length 1070.3
  Bottom Layer w25: K10.3 145.18,1204.82 145.18,1237.51 120,1262.69 102.4,1280.28 102.4,1319.72 120,1337.31 135.09,1352.4 198,1352.4 215.6,1370 970,1370 IC3.33
NetIC3_34: IC3.34 K10.2 | length 878.7
  Bottom Layer w25: K10.2 534.38,1300 569,1334.62 965.38,1334.62 IC3.34
NetK2_2: K2.2 RE1.2 RE1.5 | length 1905.6
  Top Layer w50: RE1.2 2276.18,1773.82 2276.18,1823.82 2054.72,2045.28 RE1.5 1910,2241.57 1910,2310.58 1895.71,2324.87 1895.71,2775.13 1910,2789.42 1910,2810 2294.88,3194.88 2344.88,3194.88 K2.2
NetK3_2: K3.2 R2.1 R4.2 R9.2 R13.2 | length 2949.1
  Top Layer w25: 3721,700 3731,710 ; 3772.2,1050 3778.81,1056.62
  Top Layer w50: K3.2 3350,2610 3614.57,2345.43 3614.57,1592.71 3561.93,1540.08 3561.93,1409.03 3614.57,1356.39 R2.1 3616.93,1297.64 3616.93,1278.47 3627.8,1267.6 3627.8,1256.96 3648.3,1236.46 3662.52,1236.46 3685.43,1213.54 R4.2 3685.43,1148.82 3690.16,1144.09 3691.34,1144.09 3778.81,1056.62 3778.81,757.82 3731,710 ; R13.2 R9.2 3721,700
NetK8_1: K8.1 L2.3 | length 770.7
  Bottom Layer w50: K8.1 350,450 L2.3
NetK8_2: K8.2 L2.4 | length 812.1
  Bottom Layer w50: K8.2 450,350 L2.4
NetL2_2: L2.2 T3.2 | length 1445
  Bottom Layer w50: T3.2 728.46,750 836.76,641.69 1024.15,641.69 1058.31,675.85 1058.31,724.15 1050,732.46 1050,750 ; 1067.08,732.92 L2.2
NetR7_1: R7.1 R10.1 T1.2 | length 1106.3
  Top Layer w25: R7.1 R10.1 2614.57,543.43 v1(2617,541)
  Bottom Layer w25: T1.2 2304.85,853.15 v1(2617,541)
NetR11_2: R11.2 R12.2 | length 284.9
  Top Layer w25: R11.2 3235.43,790 3249.43,804 3410,804 3435.43,778.57 R12.2
NetR17_1: R17.1 T2.2 T4.1 T5.2 | length 1318.7
  Top Layer w25: R17.1 2750,293 2770,313 3233.85,313 T2.2
  Bottom Layer w25: T2.2 T5.2 3496.85,170 3549.85,117 3672,117 T4.1
NetR18_1: R18.1 T3.1 | length 2560.5
  Top Layer w25: T3.1 89,789 89,593 130,552 1222,552 1420,750 1650,750 1827,573 1827,483.1 1935.43,374.67 R18.1
NetR18_2: R18.2 T2.3 T5.1 | length 1790.4
  Top Layer w25: R18.2 1864.57,255.91 1879.76,271.1 1879.76,280.58 1888.34,289.15 v1(1888.34,295.92) ; T2.3 3400,250 T5.1
  Bottom Layer w25: v1(1888.34,295.92) 2264.1,295.92 2269.1,290.92 2638.09,290.92 2697.18,350 T2.3
NetR19_2: R19.2 R20.2 T4.2 | length 2468
  Top Layer w50: R19.2 1700,300 1870,130 2350,130 2385.43,165.43 ; R20.2 2385.43,165.43 ; T4.2 3746.38,299.53 3746.38,293.35 3743.76,290.74 3743.76,243.76 3605,105 2744.82,105 2684.39,165.43 2385.43,165.43
Vin: B1.1 C1.2 R3.2 R17.2 T2.1 T3.3 | length 7187.1
  Top Layer w50: B1.1 2650,1218.43 2685.43,1183 R3.2 ; R3.2@2687.8,1046.46 2746.06,988.2 v1(2746.06,953.96) ; R17.2 2820.87,248.82 2825.59,244.09 2826.77,244.09 2870.87,200 3255,200 T2.1
  Bottom Layer w50: T3.3 150,200 250,100 850,100 950,200 1816.07,200 ; B1.1 2752.36,1352.36 3100,1700 3250,1700 C1.2 ; v1(2746.06,953.96) 2759.57,940.45 2759.57,479.57 2630.92,350.92 1829.29,350.92 1800,321.63 1800,216.07 1816.07,200 ; T2.1 3255,200 1816.07,200
pads on no net: IC1_2.10 IC1_2.11 IC1_2.19 IC1_2.20 IC3.3 IC3.4 IC3.25 IC3.26 IC3.40 RE1.4

## Silkscreen, mask and mechanical layers (free items; w line width, h text height)
Top Overlay:
  text "Project: Soldering Station" at 780,99.99 h60
  text "Year: 2023" at 2410,60 h60
  text "Designer: Mauro De Bruyn" at 780,19.99 h60
Board Outline:
  lines w10: 0,3450 0,0 3950,0 3950,3450 ; 0,3450 3450,3450 3950,3450 ; 0,3450 3950,3450